# Altium PCB 6612.PcbDoc
Units mil, origin at the board's own origin, x right, y up, seen from the top; angles counter-clockwise.
Board outline 785 x 845 mil, 2 copper layers (Top Layer, Bottom Layer); 7 components, 14 nets, 48 pads, 8 vias.
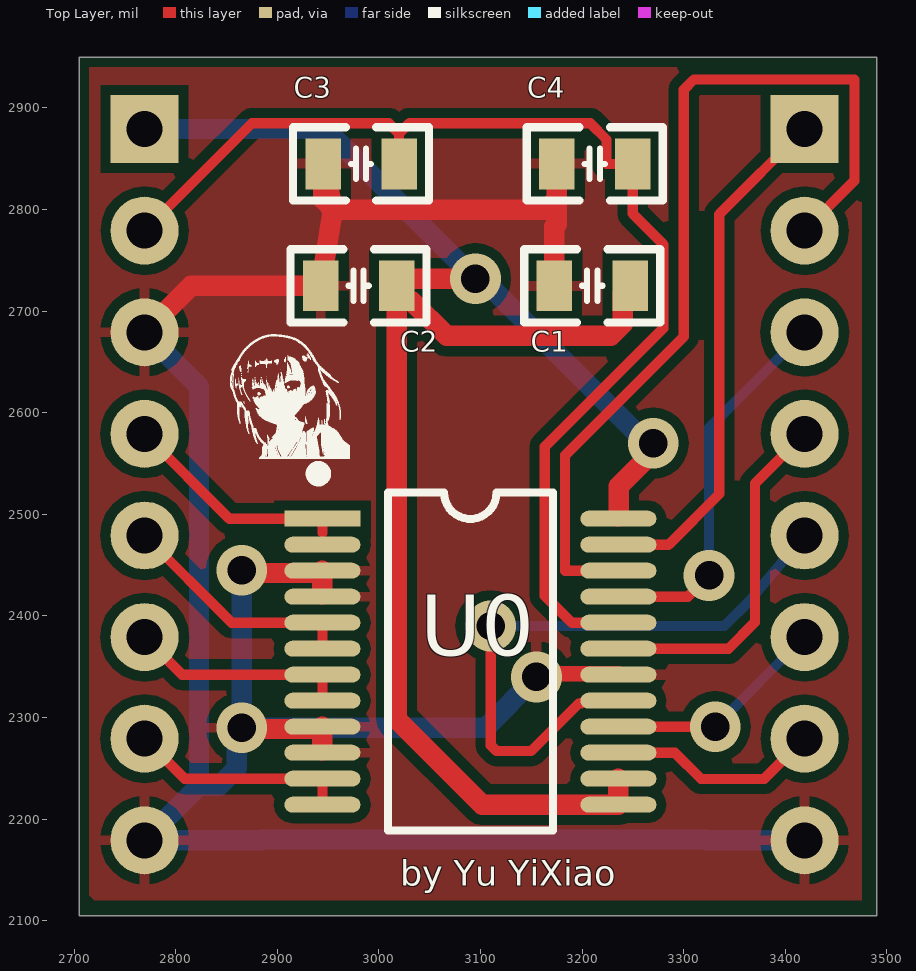
[diagram p0: Top Layer view]
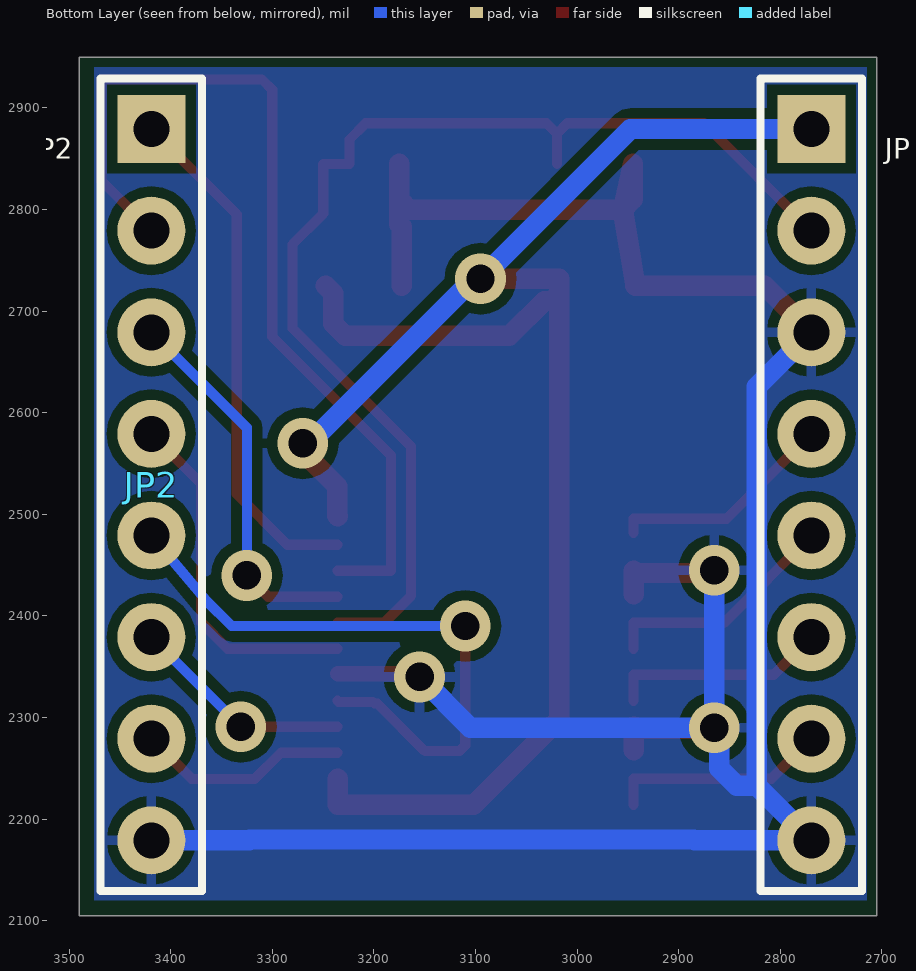
[diagram p1: Bottom Layer view, seen from below]

## Layer stack, top to bottom
Top Solder: solder mask 0.4, Solder Resist, Dk 3.5
Top Layer: signal copper 1.4
Dielectric 1: dielectric 12.6, FR-4, Dk 4.8
Bottom Layer: signal copper 1.4
Bottom Solder: solder mask 0.4, Solder Resist, Dk 3.5

## Board outline
2705,2105 3490,2105 3490,2950 2705,2950

## Design rules (kind name [scope] priority, off if disabled: settings)
Clearance [All] p1: gap=10 ignorepadtopadclearanceinfootprint=FALSE except(0: Arc-Hole Track-Hole SMDPad-Hole THPad-Hole Via-Hole Fill-Hole Poly-Hole Region-Hole Text-Hole)
PolygonConnect [All] p1: connectstyle=Relief reliefconductorwidth=10 reliefentries=4 polygonreliefangle="90 Angle" airgapwidth=10
RoutingVias [All] p1: holewidth=28 width=50 viastyle="Through Hole" minholewidth=28 minwidth=50 maxholewidth=28 maxwidth=50
SolderMaskExpansion [All] p1: expansion=4 istentingtop=FALSE
Width power [InNetClass('power')] p1: maxlimit=20 minlimit=20 preferedwidth=20 minimp=50.000000 maximp=50.000000 favimp=50.000000
Width [All] p2: maxlimit=10 minlimit=10 preferedwidth=10
30 further rules are at their usual default settings.

## Classes and differential pairs
net class power: GND VM

## Components (designator, comment, footprint, x,y, rotation, side; value= is the part's Value field where it differs from the comment)
C1 "10μF" C0805_L 3210,2725 r0 top
C2 "0.1μF" C0805_L 2980,2725 r0 top
C3 "10μF" C0805_L 2982.4,2845 r0 top
C4 "0.1μF" C0805_L 3212.4,2845 r0 top
JP1 "HDR-1X8" HDR2.54-LI-8P 2769.33,2529.25 r270 bottom
JP2 "HDR-1X8" HDR2.54-LI-8P 3418.94,2529.25 r270 bottom
U0 "TB6612FNG" SSOP24_M 3090,2355 r0 top

## Footprints (in the part's own frame and the unit in brackets; to place one, negate y for a bottom-side part, rotate by r counter-clockwise, add the part's x,y. Pads: shape width x height; smd on the part's side, far side on the other; paste and mask are expansions set on the pad)
C0805_L [mil] "贴片MLCC电容"
  rect 35x50 smd: 1(-37.4,0) 2(37.4,0)
  silkscreen extent -67,-36 67,36, body extent -39,-24 39,24, height 22
HDR2.54-LI-8P [mm] "排针，8脚"
  rect 1.7x1.7 hole 0.9: 1(-8.89,0)
  round 1.7 hole 0.9: 2(-6.35,0) 3(-3.81,0) 4(-1.27,0) 5(1.27,0) 6(3.81,0) 7(6.35,0) 8(8.89,0)
  silkscreen extent -10.16,-1.27 10.16,1.27, body extent -10.16,-1.27 10.16,1.27, height 2.54
SSOP24_M [mm] "8.3*7.8*1.6（长宽高）"
  rect 1.9x0.4 smd: 1(-3.7,3.575)
  oval 1.9x0.4 smd: 2(-3.7,2.925) 3(-3.7,2.275) 4(-3.7,1.625) 5(-3.7,0.975) 6(-3.7,0.325) 7(-3.7,-0.325) 8(-3.7,-0.975) 9(-3.7,-1.625) 10(-3.7,-2.275) 11(-3.7,-2.925) 12(-3.7,-3.575) 13(3.7,-3.575) 14(3.7,-2.925) 15(3.7,-2.275) 16(3.7,-1.625) 17(3.7,-0.975) 18(3.7,-0.325) 19(3.7,0.325) 20(3.7,0.975) 21(3.7,1.625) 22(3.7,2.275) 23(3.7,2.925) 24(3.7,3.575)
  silkscreen extent -3.93,-4.22 2.07,4.83, body extent -3.85,-4.15 3.85,4.15, height 1.65

## Part data
C1 C2 C3 C4: library part C, "贴片电容/MLCC电容", BOM名称=无极性贴片电容, 联系卖家，免费查找封装=唯一出售店铺网址https://shop463601444.taobao.com
JP1 JP2: library part "Header 8", "8P接插件", BOM名称=8P接插件, 封装库来自淘宝卖家ID:黄晶宝石=其他店铺购入均为盗版假冒封装库，请立即申请退款，本店现金奖励20~200元, 联系卖家，免费查找封装=唯一出售店铺网址https://shop463601444.taobao.com
U0: "电机驱动", BOM名称=TB6612FNG, 联系卖家 免费查找封装=唯一出售店铺网址https://shop463601444.taobao.com

## Via types
v1: diameter 50, hole 28, Top Layer to Bottom Layer, 8 vias

## Nets (pads, with @x,y where several pads share a name; then routed paths per layer and width w, separated by ;. In a path a pad name is that pad's centre, name@x,y a point inside that pad or via, vN(x,y) a via of type N, cw(c..) or ccw(c..) an arc to the next point about the centre after c; other vN are vias at no path point)
AIN1: JP2.3 U0.21 | length 376.2
  Top Layer w10: U0.21 3303.98,2418.98 v1(3325,2440)
  Bottom Layer w10: v1(3325,2440) 3325,2585.31 JP2.3
AIN2: JP2.2 U0.22 | length 915.4
  Top Layer w10: U0.22 3183.27,2444.57 3183.27,2558.27 3300,2675 3300,2918 3310,2928 3468,2928 3468,2828.31 JP2.2
AO1: JP1.4 U0.1 U0.2 | length 223.3
  Top Layer w10: JP1.4 2852.83,2495.75 U0.1 2944.33,2482
AO2: JP1.5 U0.5 U0.6 | length 236.2
  Top Layer w10: JP1.5 2855.2,2393.39 U0.5 U0.6
BIN1: JP2.5 U0.17 | length 615.1
  Top Layer w10: v1(3110,2390.16) 3110,2272.85 3115.86,2266.99 3149.76,2266.99 3196.67,2313.9 3199.36,2313.9 3200.98,2315.51 3234.57,2315.51 U0.17
  Bottom Layer w10: v1(3110,2390.16) 3340,2390.16 3365,2415.16 JP2.5
BIN2: JP2.6 U0.16 | length 220
  Top Layer w10: U0.16 v1(3331,2291.02)
  Bottom Layer w10: v1(3331,2291.02) 3331,2291.31 JP2.6
BO1: JP1.7 U0.11 U0.12 | length 216.9
  Top Layer w10: JP1.7 2808.74,2239.84 U0.11 U0.12
BO2: JP1.6 U0.7 U0.8 | length 215.9
  Top Layer w10: JP1.6 2806.38,2342.21 U0.7 U0.8
GND: C1.1 C2.1 C3.1 C4.1 JP1.3 JP1.8 JP2.8 U0.3 U0.4 U0.9 U0.10 U0.18 | length 2744
  Top Layer w15: v1@3158.1,2343.1 U0.18@3235.67,2343.1
  Top Layer w20: JP1.3 2815.07,2725 C2.1 2955,2800 ; v1(2865,2290) 2866.26,2288.74 U0.9@2944.33,2288.74 ; v1(2865,2445) 2867.72,2442.28 U0.3@2944.33,2442.28 ; U0.10@2944.33,2267.72 U0.9@2944.33,2288.74 ; U0.9 U0.9@2944.33,2288.74 ; U0.4@2944.33,2421.26 U0.3@2944.33,2442.28 ; U0.3 U0.3@2944.33,2442.28 ; v1(3155,2340) v1@3158.1,2343.1 ; C1.1 3172.6,2783 3175,2785.4 3175,2810 ; C4.1 3175,2810 ; 2955,2800 C3.1 2945,2810 2955,2800 ; 2955,2800 3165,2800 3175,2810
  Bottom Layer w20: JP1.3 2823,2625.58 2823,2232.92 ; v1(2865,2445) v1(2865,2290) ; v1(3155,2340) 3105,2290 v1(2865,2290) ; JP2.8 3322.75,2179.25 3322,2180 2885,2180 2884.25,2179.25 JP1.8 2823,2232.92 ; 2823,2232.92 2842.92,2232.92 2860,2250 2860,2285 v1(2865,2290)
PWMA: JP2.1 U0.23 | length 514
  Top Layer w10: U0.23 3285.16,2470.16 3335,2520 3335,2795.31 JP2.1
PWMB: JP2.7 U0.15 | length 210.3
  Top Layer w10: U0.15 3291.33,2265.43 3317.08,2239.68 3379.36,2239.68 JP2.7
STBY: JP2.4 U0.19 | length 350.8
  Top Layer w10: U0.19 3344,2367.8 3370,2393.8 3370,2530.31 JP2.4
VCC: C3.2 C4.2 JP1.2 U0.20 | length 1162.4
  Top Layer w10: JP1.2 2875.08,2885 3009.61,2885 3019.8,2874.8 ; C3.2 3019.8,2874.8 ; U0.20 3189.88,2393.39 3163.27,2420 3163.27,2566.55 3280,2683.28 3280,2765.8 3249.8,2796 C4.2 3224,2845 3224,2869 3208,2885 3030,2885 3019.8,2874.8
VM: C1.2 C2.2 JP1.1 U0.13 U0.14 U0.24 | length 1797.7
  Top Layer w20: v1(3095,2732) 3017.4,2732 C2.2 ; U0.14 U0.13 3101.75,2214.25 3017.4,2298.6 C2.2 ; U0.24@3235.67,2498.03 3235.98,2498.34 3235.98,2527.86 3270,2561.88 v1(3270,2570) ; C1.2 3240.04,2717.64 3240.04,2687.43 3228.32,2675.71 3066.68,2675.71 3032.4,2710 3024.9,2710 3017.4,2717.5 C2.2
  Bottom Layer w20: JP1.1 2947.75,2879.25 v1(3095,2732) 3101.5,2732 3263.5,2570 v1(3270,2570)

## Polygon pours and split planes (outlines as drawn)
GND on Top Layer "NONET_L-01_P-001" (solid, pour order 5): 2715,2940 3470,2940 3475,2935 3475,2120 2720,2120 2715,2125
GND on Top Layer "NONET_L-01_P-001" (solid, pour order 0): 3130,2590
GND on Bottom Layer "NONET_L-01_P-001" (solid, pour order 6): 2715,2940 3475,2940 3475,2120 2715,2120

## Silkscreen, mask and mechanical layers (free items; w line width, h text height)
Top Overlay:
  drawing of 7613 lines, arcs and shapes, not listed
  text "by Yu YiXiao" at 3021,2134.33 h25
Mechanical 1:
  the board outline again, w10